# Allegro board XR871GT_REF_Simple_L2_V1_0-20170701.brd
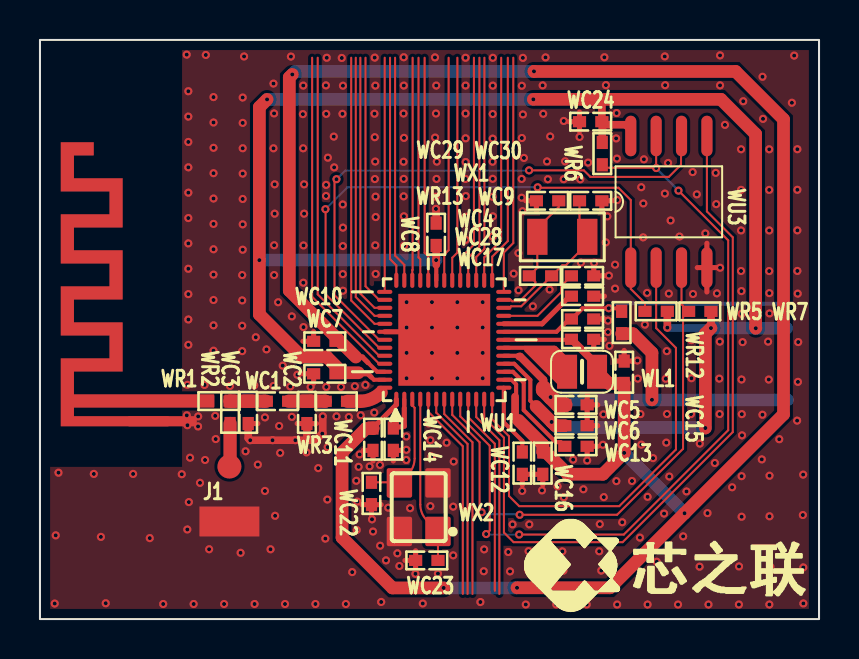
[diagram p0: board, top side]
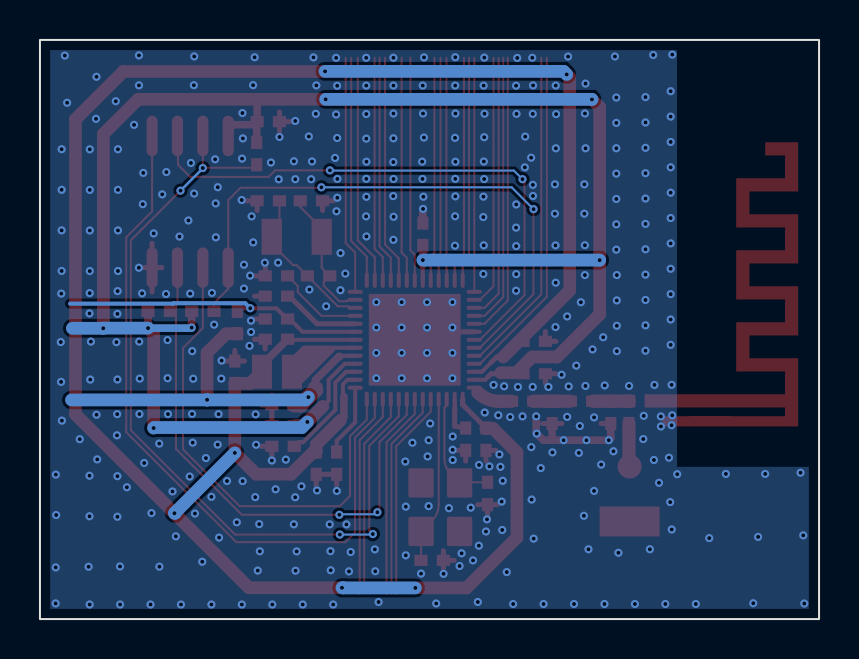
[diagram p1: board, bottom side, seen from below]

Outline 39 x 29 mm; copper layers: TOP, BOTTOM. Coordinates in mm from the lower left corner of the outline.
Outline path: rectangle 0,0 39,29

## Design rules (mm)
net group RF: nets ANT N16735516 N16735520

## Placement (name value [footprint] x y rotation side)
J1  ANT  [ANT2]  9.48 6.14 0 top
NOREF  -  []  0.51 7.62 90 top
NOREF#2  -  []  0 29 0 top
NOREF#3  -  []  0.51 7.62 90 top
NOREF#4  -  []  0 29 0 top
NOREF#5  -  []  1.04 9.65 90 top
NOREF#6  -  []  4.14 22.07 0 top
NOREF#7  -  []  0 0 90 top
WC1  0R  [C0402]  11.89 10.91 180 top
WC2  NC  [C0402]  13.36 10.35 90 top
WC3  NC  [C0402]  10.43 10.35 90 top
WC4  4.7uF  [C0402]  27.16 16.17 180 top
WC5  4.7uF  [C0402]  26.83 10.73 0 top
WC6  4.7uF  [C0402]  26.83 9.69 0 top
WC7  104  [C0402]  14.26 12.28 0 top
WC8  104  [C0402]  19.83 19.27 90 top
WC9  1uF  [C0402]  27.16 17.19 180 top
WC10  104  [C0402]  14.26 13.91 0 top
WC11  104  [C0402]  16.67 9.01 90 top
WC12  4.7uF  [C0402]  24.15 7.81 90 top
WC13  4.7uF  [C0402]  26.83 8.65 180 top
WC14  1uF  [C0402]  17.69 9.01 90 top
WC15  4.7uF  [C0402]  29.25 12.36 90 top
WC16  NC-104  [C0402]  25.17 7.81 90 top
WC17  NC-104  [C0402]  27.16 14.01 180 top
WC22  20pF  [C0402]  16.6 6.29 90 top
WC23  20pF  [C0402]  19.36 2.94 180 top
WC24  104  [C0402]  27.57 24.91 180 top
WC28  100pF  [C0402]  27.16 15.03 180 top
WC29  18pF  [C0402]  25.41 20.94 180 top
WC30  18pF  [C0402]  27.57 20.94 0 top
WL1  3.3uH-1.0A DCR<0.2R  [L0806]  27.14 12.39 0 top
WR1  0R  [R0402]  8.96 10.91 180 top
WR2  NC-0R  [R0402]  9.52 10.35 270 top
WR3  0R-NC  [R0402]  14.84 10.91 180 top
WR5  100K-NC  [R0402]  30.85 15.41 0 top
WR6  NC-100K  [R0402]  28.15 23.31 90 top
WR7  NC-100K  [R0402]  33.03 15.41 0 top
WR12  10K  [R0402]  29.12 14.85 270 top
WR13  NC-10M  [R0402]  25.05 17.19 180 top
WU1  XR871G  [QFN52P0_4B6X6_NOSOCKET]  20.24 13.98 0 top
WU3  PN25F16BSSIUG  [SOIC-8]  31.48 20.89 90 top
WX1  32768_FC-135  [XATL-FC-135]  26.15 19.14 180 top
WX2  24MHz-E3SB24E004304E  [CRY-TSX3225]  18.96 5.6 180 top

## Library data of the parts
J1 = ANT_0
WC1-WC9 WC12-WC15 WC23 WC24 = CAPACITOR
WC10 WC11 WC16 WC17 WC22 WC28-WC30 = CAPACITOR_0
WL1 = INDUCTOR
WR1-WR3 WR5-WR7 = R
WR12 WR13 = R1 0805
WU1 = XR871G
WU3 = SPI-NOR-SO8
WX1 = CRYSTAL_32.768K_FC-135
WX2 = Crystal4Pin_0

## Footprints (pads in the part's own frame, mm; a bottom-side part is the same pattern mirrored in y, then rotated)
ANT2
  round 1.2 smd: 1(0,1.5)
  rect 3x1.5 smd: 2(0,-1.25)
C0402
  rect 0.66x0.56 smd: 1(-0.56,0) 2(0.56,0)
CRY-TSX3225
  custom 1.27x1.47 smd: 1(-0.965,1.215) 2(-0.965,-1.215) 3(0.965,-1.215) 4(0.965,1.215)
L0806
  rect 1x1.7 smd: 1(0.75,0) 2(-0.75,0)
QFN52P0_4B6X6_NOSOCKET
  oval 0.203x0.762 smd: 1(-2.4,-2.981) 2(-2,-2.981) 3(-1.6,-2.981) 4(-1.2,-2.981) 5(-0.8,-2.981) 6(-0.4,-2.981) 7(0,-2.981) 8(0.4,-2.981) 9(0.8,-2.981) 10(1.2,-2.981) 11(1.6,-2.981) 12(2,-2.981) 13(2.4,-2.981) 27(2.4,2.981) 28(2,2.981) 29(1.6,2.981) 30(1.2,2.981) 31(0.8,2.981) 32(0.4,2.981) 33(0,2.981) 34(-0.4,2.981) 35(-0.8,2.981) 36(-1.2,2.981) 37(-1.6,2.981) 38(-2,2.981) 39(-2.4,2.981)
  oval 0.762x0.203 smd: 14(2.981,-2.4) 15(2.981,-2) 16(2.981,-1.6) 17(2.981,-1.2) 18(2.981,-0.8) 19(2.981,-0.4) 20(2.981,0) 21(2.981,0.4) 22(2.981,0.8) 23(2.981,1.2) 24(2.981,1.6) 25(2.981,2) 26(2.981,2.4) 40(-2.981,2.4) 41(-2.981,2) 42(-2.981,1.6) 43(-2.981,1.2) 44(-2.981,0.8) 45(-2.981,0.4) 46(-2.981,0) 47(-2.981,-0.4) 48(-2.981,-0.8) 49(-2.981,-1.2) 50(-2.981,-1.6) 51(-2.981,-2) 52(-2.981,-2.4)
  rect 4.597x4.597 smd: 53(0,0)
R0402
  rect 0.66x0.56 smd: 1(-0.56,0) 2(0.56,0)
SOIC-8
  oval 2.032x0.559 smd: 1(-3.296,1.905) 2(-3.296,0.635) 3(-3.296,-0.635) 4(-3.296,-1.905) 5(3.296,-1.905) 6(3.296,-0.635) 7(3.296,0.635) 8(3.296,1.905)
XATL-FC-135
  rect 1.016x1.803 smd: 1(-1.25,0) 2(1.25,0)

## Nets
GND: J1.2 WC2.1 WC3.1 WC4.1 WC5.2 WC6.2 WC7.1 WC8.2 WC9.1 WC10.1 WC11.1 WC12.1 WC13.1 WC14.1 WC15.2 WC16.1 WC17.1 WC22.1 WC23.2 WC24.2 WC28.1 WC29.2 WC30.2 WU1.45(TEST) WU1.53(EPAD) WU3.4(VSS) WX2.2 WX2.4(5)
VCC-BAT: WC5.1 WR12.2 WU1.18(VCC)
VDD25-EF: WC4.2 WU1.22(VDD25_EF)
VDD-3V3: WC6.1 WC7.2 WC8.1 WC24.1 WR5.2 WR6.2 WR7.2 WU1.17(VDD_3V3) WU1.34(VDD_IO) WU1.51(VDD33_PA) WU3.8(VCC)
ANT: WC1.1 WC2.2 WR3.2
CHIP-PWD: WC28.2 WR12.1 WU1.21(CHIP_PWD)
HXTAL1: WC23.1 WU1.4(HXTAL1) WX2.1
HXTAL2: WC22.2 WU1.3(HXTAL2) WX2.3
LXTAL1: WC29.1 WR13.2 WU1.25(LXTAL1) WX1.2
LXTAL2: WC30.1 WR13.1 WU1.24(LXTAL2) WX1.1
PA0: WU1.5(PA0/SPI1_MOSI/SD_CMD/UART0_TX/C)
PA1: WU1.6(PA1/SPI1_MISO/SD_DATA0/UART0_RX)
PA2: WU1.11(PA2/SPI1_CLK/SD_CLK/TWI1_SCL/CS)
PA3: WU1.10(PA3/SPI1_CS0/SD_DATA1/TWI1_SDA/)
PA4: WU1.35(PA4/WUPIO0/UART1_CTS/SD_DATA2/T)
PA5: WU1.36(PA5/WUPIO1/UART1_RTS/SD_DATA3/T)
PA6: WU1.37(PA6/WUPIO2/UART1_TX/SPI1_CS1/TW)
PA7: WU1.38(PA7/WUPIO3/UART1_RX/SPI1_CS2/TW)
PA8: WU1.26(PA8/ADC_CH0/PWM0/TWI1_SCL/CSI_P)
PA9: WU1.27(PA9/ADC_CH1/PWM1/TWI1_SDA/CSI_M)
PA10: WU1.28(PA10/ADC_CH2/PWM2/DMIC_CLK/CSI_)
PA11: WU1.29(PA11/ADC_CH3/PWM3/DMIC_DATA/CSI)
PA12: WU1.30(PA12/ADC_CH4/PWM4/I2S_MCLK/IR_T)
PA13: WU1.31(PA13/ADC_CH5/PWM5/I2S_BCLK/32KO)
PA14: WU1.32(PA14/ADC_CH6/PWM6/I2S_DI/IR_RX/)
PA15: WU1.33(PA15/ADC_CH7/PWM7/I2S_DO/UART1_)
PA16: WU1.7(PA16/IR_TX/IR_RX/I2S_LRCLK/UART)
PA17: WU1.39(PA17/WUPIO4/TWI0_SCL/IR_RX/TWI1)
PA18: WU1.40(PA18/WUPIO5/TWI0_SDA/IR_TX/TWI1)
PA19: WU1.41(PA19/WUPIO6/NUART_CTS/NSWD_TMS/)
PA20: WU1.42(PA20/WUPIO7/NUART_RTS/NSWD_TCK/)
PA21: WU1.43(PA21/WUPIO8/NUART_TX/DMIC_CLK/P)
PA22: WU1.44(PA22/WUPIO9/NUART_RX/DMIC_DATA/)
PCBANT: WR1.2
SPI0-CLK: WU1.46(PB7/SPI0_CLK/SD_CLK/FLASH_CLK/E) WU3.6(CLK)
SPI0-CS: WR5.1 WU1.47(PB6/SPI0_CS0/FLASH_CS/EINTB6) WU3.1(CS#)
SPI0-HOLD: WR6.1 WU1.9(PB3/SWD_TCK/JTAG_TDI/PWM7/FLASH) WU3.7(HOLD#)
SPI0-MISO: WU1.13(PB5/SPI0_MISO/SD_DATA0/FLASH_MI) WU3.2(MISO)
SPI0-MOSI: WU1.12(PB4/SPI0_MOSI/SD_CMD/FLASH_MOSI) WU3.5(MOSI)
SPI0-WP: WR7.1 WU1.8(PB2/SWD_TMS/JTAG_TDO/PWM6/FLASH) WU3.3(WP#)
UART0-RX: WU1.48(PB1/UART0_RX/JTAG_TCK/PWM5/SWD_)
UART0-TX: WU1.49(PB0/UART0_TX/JTAG_TMS/PWM4/SWD_)
N16732104: WC10.2 WC11.2 WC15.1 WC16.2 WC17.2 WL1.1 WU1.1(VDD14_RX) WU1.15(VDD14_DIG) WU1.20(VDD_SENSE) WU1.50(VDD14_TX)
N16732180: WR3.1 WU1.52(ANT)
N16732230: WL1.2 WU1.19(VDD_VLX)
N16732278: WC14.2 WU1.2(VDD12_CLK)
N16732320: WC13.2 WU1.16(VDD12_DIG)
N16732574: WC12.2 WU1.14(VDD12_SRAM)
N16732608: WC9.2 WU1.23(VDD_RTC)
N16735516: J1.1 WR2.2
N16735520: WC1.2 WC3.2 WR1.1 WR2.1

## Via types
v1: diameter 0.406, hole 0.203, TOP to BOTTOM, 430 vias

## Routing (per net, layer and track width the routed paths; a pad name or vN(x,y) marks a point on that pad's centre or on a via; arc(x,y) is an arc through that point)
GND: length 35.9
  TOP w0.254: 28.26,17.19 WC9.1 27.72,17.67 ; 27.39,10.24 WC5.2 ; WC5.2 27.39,11.21 ; WC5.2 27.93,10.73 ; 18.8,2.45 WC23.2 ; WC23.2 18.27,2.94 ; WC23.2 18.8,3.42 ; WC4.1 28.26,16.17 ; 24.15,6.71 WC12.1 24.63,7.25 ; 17.69,7.91 WC14.1 18.17,8.45 ; 24.85,20.46 WC29.2 24.32,20.94 ; 16.67,7.91 WC11.1 16.19,8.45 ; 26.48,24.91 WC24.2 ; WC24.2 27.01,24.42 ; WC24.2 27.01,25.39 ; 24.69,7.25 WC16.1 25.17,6.71 ; 27.39,10.17 WC6.2 27.93,9.69 ; WC3.1 10.91,9.79 ; 13.7,14.39 WC10.1 13.17,13.91 ; 27.72,13.53 WC17.1 28.26,14.01 ; WU1.45 19.84,14.38 WU1.53 ; 32.9,17.6 WU3.4 ; WU3.4 33.87,17.6 ; WU3.4 33.39,18.82 ; WU3.4 33.39,16.38 ; WC15.2 29.73,12.92 ; WC15.2 28.76,12.92 ; WC15.2 29.25,13.45 ; 16.11,5.73 WC22.1 ; WC22.1 17.08,5.73 ; WC22.1 16.6,5.2 ; WC28.1 28.26,15.03 ; 12.88,9.79 WC2.1 13.85,9.79 ; 27.93,8.65 WC13.1 27.39,8.17 ; 28.13,20.46 WC30.2 28.66,20.94 ; 13.7,11.8 WC7.1 13.17,12.28
  TOP w0.381: v1(14.16,10.15) 14.16,9.31 v1(14.13,9.29) 13.8,8.96 13.27,8.96 ; WC2.1 13.36,9.05 13.27,8.96 ; WC3.1 10.43,9.06 v1(10.53,8.96) v1(11.64,8.96) v1(12.79,8.96) 13.27,8.96 ; WC8.2 19.83,20.53 v1(19.82,20.54) 19.83,20.55
  vias: v1(0.74,0.78) v1(0.79,4.19) v1(0.93,7.33) v1(2.7,7.27) v1(3.05,4.11) v1(3.29,0.79) v1(4.66,7.27) v1(5.5,4.05) v1(6.17,0.75) v1(7.1,7.25) v1(7.35,28.27) v1(7.35,10.2) v1(7.43,26.43) v1(7.43,25.16) v1(7.43,23.89) v1(7.43,22.62) v1(7.43,21.35) v1(7.43,20.08) v1(7.43,18.81) v1(7.43,17.54) v1(7.43,16.27) v1(7.43,15) v1(7.43,13.73) v1(7.38,11.73) v1(7.38,9.71) v1(7.45,5.86) v1(7.38,4.49) v1(7.51,8.08) v1(7.69,0.75) v1(7.92,10.15) v1(7.92,9.64) v1(8.01,6.82) v1(8.24,11.72) v1(8.27,7.97) v1(8.3,28.25) v1(8.47,3.5) v1(8.69,26.14) v1(8.69,24.87) v1(8.69,23.6) v1(8.69,22.33) v1(8.69,21.06) v1(8.69,19.79) v1(8.69,18.52) v1(8.69,17.25) v1(8.69,15.98) v1(8.69,14.71) v1(8.69,13.44) v1(8.77,10.18) v1(8.8,9.01) v1(9.22,0.75) v1(9.51,11.67) v1(10.04,3.32) v1(10.15,26.12) v1(10.15,24.85) v1(10.15,23.58) v1(10.15,22.31) v1(10.15,21.04) v1(10.15,19.77) v1(10.15,18.5) v1(10.12,17.23) v1(10.12,15.96) v1(10.12,14.69) v1(10.12,13.42) v1(10.22,28.17) v1(10.29,8.4) v1(10.73,11.7) v1(10.74,0.75) v1(10.81,14.11) v1(10.91,7.74) v1(11.26,10.1) v1(11.26,6.42) v1(11.34,13.5) v1(11.54,3.5) v1(11.69,26.81) v1(11.72,25.32) v1(11.69,23.57) v1(11.75,21.77) v1(11.75,20.3) v1(11.72,18.72) v1(11.72,17.23) v1(11.69,11.67) v1(11.77,5.17) v1(11.92,15.86) v1(11.97,9.67) v1(12.02,8.32) v1(12.15,12.69) v1(12.27,0.75) v1(12.56,28.17) v1(12.53,11.65) v1(12.61,15.15) v1(12.61,10.12) v1(12.89,12.23) v1(13.16,25.29) v1(13.18,26.72) v1(13.17,23.57) v1(13.22,21.77) v1(13.22,20.3) v1(13.19,18.71) v1(13.18,16.84) v1(13.19,14.62) v1(13.35,8.35) v1(13.55,11.62) v1(13.79,0.75) v1(13.93,7.56) v1(14.36,28.11) v1(14.32,26.72) v1(14.33,25.3) v1(14.33,21.74) v1(14.32,21.19) v1(14.34,11.62) v1(14.28,4.03) v1(14.41,23.1) v1(14.4,8.61) v1(14.39,5.98) v1(14.71,24.16) v1(14.73,22.62) v1(14.84,10.15) v1(15.11,28.1) v1(15.17,26.71) v1(15.14,25.3) v1(15.16,20.76) v1(15.17,19.6) v1(15.16,18.68) v1(15.16,17.27) v1(15.17,16.44) v1(15.07,11.62) v1(15.31,0.75) v1(15.46,10.12) v1(15.63,2.35) v1(15.76,11.66) v1(15.83,6.92) v1(15.86,4.46) v1(15.95,7.62) v1(15.89,5.88) v1(16.06,10.21) v1(16,8.24) v1(16.29,11.72) v1(16.5,7.64) v1(16.62,4.99) v1(16.76,28.12) v1(16.75,25.31) v1(16.76,24.13) v1(16.76,22.03) v1(16.73,10.34) v1(16.67,4.38) v1(16.79,26.71) v1(16.78,22.91) v1(16.8,21.15) v1(16.81,20.13) v1(16.78,18.71) v1(16.8,17.28) v1(17.02,7.72) v1(17.03,3.67) v1(17.08,0.86) v1(17.32,2.94) v1(17.43,5.58) v1(17.89,3.29) v1(17.99,2.66) v1(18.21,28.13) v1(18.21,26.72) v1(18.2,25.32) v1(18.22,24.1) v1(18.2,22.9) v1(18.21,22.04) v1(18.21,21.17) v1(18.22,20.17) v1(18.22,18.69) v1(18.35,15.87) v1(18.35,14.6) v1(18.35,13.33) v1(18.35,12.06) v1(18.34,9.14) v1(18.34,8.47) v1(18.34,7.97) v1(18.53,5.55) v1(18.8,2.27) v1(19.16,0.78) v1(19.47,9.79) v1(19.54,8.96) v1(19.54,5.65) v1(19.62,15.87) v1(19.62,14.6) v1(19.62,13.33) v1(19.62,12.06) v1(19.59,8.14) v1(19.77,28.13) v1(19.84,26.72) v1(19.82,25.32) v1(19.78,24.11) v1(19.87,22.91) v1(19.85,22.04) v1(19.81,21.15) v1(19.92,2.28) v1(20.36,8.83) v1(20.71,7.89) v1(20.69,5.63) v1(20.69,3.19) v1(20.89,15.87) v1(20.89,14.6) v1(20.89,13.33) v1(20.89,12.06) v1(21.31,28.11) v1(21.31,26.72) v1(21.31,25.32) v1(21.31,24.07) v1(21.31,22.89) v1(21.3,22.04) v1(21.32,21.18) v1(21.3,20.14) v1(21.31,18.99) v1(22.05,0.85) v1(22.16,15.87) v1(22.16,14.6) v1(22.16,13.33) v1(22.16,12.06) v1(22.24,3.49) v1(22.21,2.4) v1(22.67,28.11) v1(22.67,26.71) v1(22.66,25.29) v1(22.66,24.06) v1(22.66,22.9) v1(22.66,22.04) v1(22.66,21.15) v1(22.66,19.16) v1(22.67,20.17) v1(23.44,3.36) v1(23.53,2.39) v1(23.66,4.74) v1(23.71,17.3) v1(23.95,18.33) v1(23.96,16.47) v1(24.12,26.71) v1(24.12,24.09) v1(24.11,22.04) v1(24.11,21.1) v1(24.16,20.42) v1(24.14,6.42) v1(24.17,28.1) v1(24.18,25.27) v1(24.23,23.09) v1(24.32,0.73) v1(24.46,3.4) v1(24.44,2.44) v1(24.5,4.74) v1(24.67,15.66) v1(25.16,26.72) v1(25.13,6.44) v1(25.19,25.3) v1(25.31,28.13) v1(25.38,22.92) v1(25.43,22.02) v1(25.54,24.17) v1(25.51,16.5) v1(25.84,0.73) v1(25.91,6.65) v1(26.15,3.39) v1(26.22,24.94) v1(26.22,22.03) v1(26.22,6.1) v1(26.21,2.42) v1(26.29,22.92) v1(26.29,4.74) v1(26.69,7.98) v1(27.01,24.14) v1(27.05,22.02) v1(27.08,17.85) v1(27.2,6.5) v1(27.37,0.73) v1(27.44,22.86) v1(27.39,7.94) v1(27.74,17.85) v1(28.02,4.75) v1(27.99,3.39) v1(28.1,2.43) v1(28.25,28.13) v1(28.2,10.25) v1(28.18,8.73) v1(28.22,6.11) v1(28.33,26.74) v1(28.33,18.86) v1(28.4,20.17) v1(28.44,14.94) v1(28.43,14.37) v1(28.48,17.2) v1(28.51,13.68) v1(28.86,25.34) v1(28.84,24.07) v1(28.79,17.74) v1(28.79,16.55) v1(28.85,6.91) v1(28.88,23.06) v1(28.9,20.98) v1(28.89,0.73) v1(29.15,4.85) v1(29.64,6.91) v1(29.91,12.94) v1(29.92,12.04) v1(30.06,10.26) v1(30.03,4.08) v1(30.1,21.63) v1(30.1,8.74) v1(30.23,23.02) v1(30.2,20.81) v1(30.2,19.11) v1(30.28,14.74) v1(30.39,16.33) v1(30.42,6.12) v1(30.42,0.73) v1(30.69,8.06) v1(30.88,2.87) v1(31.24,5.28) v1(31.28,28.17) v1(31.3,26.73) v1(31.28,21.31) v1(31.33,12.03) v1(31.35,8.83) v1(31.44,22.84) v1(31.38,13.42) v1(31.39,10.27) v1(31.57,19.96) v1(31.48,16.3) v1(31.5,7.14) v1(31.94,0.73) v1(32.01,19.15) v1(32.2,4.14) v1(32.36,6.39) v1(32.61,13.97) v1(32.61,12.06) v1(32.59,10.26) v1(32.67,22.38) v1(32.69,16.28) v1(32.88,21.27) v1(33.03,8.79) v1(33.02,2.62) v1(33.31,19.31) v1(33.42,5.31) v1(33.46,0.73) v1(33.83,22.34) v1(33.85,20.78) v1(33.78,7.82) v1(33.89,16.31) v1(34.04,28.23) v1(34.04,26.73) v1(34.05,17.59) v1(34.03,13.89) v1(34.01,12.04) v1(34.02,10.27) v1(34.29,24.75) v1(34.65,6.6) v1(34.99,2.63) v1(34.99,0.73) v1(35.1,23.53) v1(35.1,21.49) v1(35.1,19.46) v1(35.1,17.43) v1(35.11,16.42) v1(35.12,15.28) v1(35.12,12) v1(35.13,10.26) v1(35.14,9.2) v1(35.12,7.16) v1(35.12,5.12) v1(35.2,25.93) v1(35.17,13.87) v1(36.17,27.16) v1(36.17,10.23) v1(36.13,8) v1(36.2,25.05) v1(36.45,13.89) v1(36.5,23.52) v1(36.5,21.49) v1(36.5,19.46) v1(36.5,17.43) v1(36.51,16.32) v1(36.52,15.31) v1(36.48,11.99) v1(36.52,7.18) v1(36.52,5.15) v1(36.57,2.62) v1(36.51,0.73) v1(37.01,9.01) v1(37.64,25.85) v1(37.75,28.22) v1(37.91,23.53) v1(37.91,21.5) v1(37.91,19.46) v1(37.91,17.43) v1(37.93,16.3) v1(37.96,13.87) v1(37.94,11.88) v1(37.9,9.94) v1(38.2,7.23) v1(38.19,5.21) v1(38.21,2.59) v1(38.21,0.78)
VCC-BAT: length 20.6
  TOP w0.203: 23.95,13.18 WU1.18
  TOP w0.254: 23.99,13.15 23.95,13.18
  TOP w0.381: 25.21,11.57 25.21,11.98 24.04,13.15 23.99,13.15
  TOP w0.635: v1(30.63,10.98) 30.63,13.33 29.68,14.29 WR12.2
  TOP w0.762: 25.21,11.57 25.21,11.47 v1(25.56,11.12) 25.95,10.73 WC5.1
  BOTTOM w0.635: v1(25.56,11.12) 25.7,10.97 30.63,10.97 v1(30.63,10.98) 30.64,10.97 37.42,10.97
VDD25-EF: length 4
  TOP w0.102: WC4.2 26.52,16.17
  TOP w0.254: 26.52,16.17 25.14,14.78 WU1.22
VDD-3V3: length 94
  TOP w0.127: 15.15,12.33 15.1,12.28 WC7.2
  TOP w0.203: WU1.51 16.71,11.98 16.58,12.12 ; WU1.17 23.74,12.78 24.55,11.98 24.55,10.94 24.84,10.65 ; WU1.34 19.84,17.74
  TOP w0.254: 15.94,12.33 15.99,12.28 16.42,12.28 16.58,12.12
  TOP w0.381: WC8.1 v1(19.83,17.98) 19.84,17.97 19.84,17.74 ; WU3.8 29.58,24.5 29.32,24.75 28.28,24.75 28.15,24.89 ; WR7.2 33.59,14.57 v1(33.59,14.57) ; 28.15,24.89 WR6.2 ; 28.15,24.89 WC24.1 28.13,26 28.1,26.02 ; WR5.2 v1(31.41,14.59)
  TOP w0.635: v1(24.7,26.02) 34.09,26.02 35.82,24.29 35.82,14.62 35.83,14.61 v1(35.83,14.56) ; v1(33.31,9.57) 33.31,14.29 v1(33.59,14.57) ; 24.84,10.65 v1(25.61,9.87) 25.8,9.69 WC6.1 ; 15.94,12.33 15.15,12.33 14.36,13.12 13.12,13.12 10.98,15.25 v1(10.98,17.97) 10.98,25.63 v1(11.37,26.02)
  BOTTOM w0.381: v1(33.59,14.57) 31.43,14.57 v1(31.41,14.59)
  BOTTOM w0.635: v1(19.83,17.98) 10.99,17.98 v1(10.98,17.97) ; v1(25.61,9.87) 25.89,9.59 33.28,9.59 v1(33.31,9.57) ; v1(24.7,26.02) 11.37,26.02 v1(11.37,26.02) ; v1(33.59,14.57) 35.82,14.57 v1(35.83,14.56) 37.38,14.56
ANT: length 2
  TOP w0.102: WC2.2 13.57,10.91
  TOP w0.66: WC1.1 14.27,10.91 WR3.2
CHIP-PWD: length 15.6
  TOP w0.203: WR12.1 28.97,15.56 28.48,15.56 v1(28.47,15.57) 28.47,15.56 27.16,15.56 26.63,15.03 WC28.2 26.5,15.03 25.85,14.38 WU1.21
  BOTTOM w0.203: v1(28.47,15.57) 28.72,15.81 32.32,15.81 32.34,15.79 37.49,15.79
HXTAL1: length 8.4
  TOP w0.102: WC23.1 WX2.1 19.36,4.95 arc(19.12,5.31) 19.04,5.73 WU1.4
HXTAL2: length 5.9
  TOP w0.102: WC22.2 17.96,6.85 WX2.3 18.43,7.25 arc(18.67,7.62) 18.76,8.04 18.76,10.58 18.64,10.7 WU1.3
LXTAL1: length 6.9
  TOP w0.102: WC29.1 25.97,20.64 24.9,19.57 WX1.2 24.9,17.59 WR13.2 24.8,16.88 24.8,16.7 24.01,15.92 23.63,15.92 23.56,15.98 WU1.25
LXTAL2: length 7.8
  TOP w0.102: WC30.1 27.01,19.53 WX1.1 27.4,18.79 26.32,17.72 26.15,17.72 WR13.1 24.09,15.66 23.58,15.66 23.5,15.58 WU1.24
PA0: length 10.5
  TOP w0.102: WU1.5 19.44,10.38 21.17,8.65 21.17,1.26
PA1: length 10.4
  TOP w0.102: WU1.6 19.84,10.34 21.41,8.77 21.41,1.26
PA2: length 10.2
  TOP w0.102: 23,1.26 23,8.96 21.84,10.11 WU1.11
PA3: length 10.1
  TOP w0.102: 22.77,1.41 22.77,8.78 21.44,10.11 WU1.10
PA4: length 11.2
  TOP w0.102: 19.26,28.11 19.26,18.34 19.44,18.16 WU1.35
PA5: length 11.2
  TOP w0.102: 18.95,28.11 18.95,18.11 19.04,18.02 WU1.36
PA6: length 11.1
  TOP w0.102: WU1.37 18.64,17.47 18.65,17.49 18.65,28.11
PA7: length 11.3
  TOP w0.102: WU1.38 18.24,17.74 17.78,18.2 17.78,28.11
PA8: length 11.9
  TOP w0.102: 23.69,28.11 23.69,18.83 23.22,18.35 WU1.26
PA9: length 11.5
  TOP w0.102: 23.42,28.11 23.42,18.93 22.64,18.15 WU1.27
PA10: length 11.5
  TOP w0.102: WU1.28 22.24,18.11 23.09,18.96 23.09,28.11
PA11: length 11.3
  TOP w0.102: 22.25,28.11 22.25,18.54 21.84,18.13 WU1.29
PA12: length 11.4
  TOP w0.102: WU1.30 21.44,18.1 22,18.66 22,28.11
PA13: length 11.4
  TOP w0.102: 21.72,28.11 21.72,18.75 21.04,18.07 WU1.31
PA14: length 11.2
  TOP w0.102: WU1.32 20.64,18.09 20.9,18.35 20.9,28.11
PA15: length 11.2
  TOP w0.102: WU1.33 20.24,18.25 20.46,18.47 20.46,28.11
PA16: length 10.3
  TOP w0.102: WU1.7 20.24,10.27 21.65,8.85 21.65,1.26
PA17: length 11.3
  TOP w0.102: WU1.39 17.84,17.71 17.52,18.03 17.52,28.11
PA18: length 11.7
  TOP w0.102: WU1.40 17.26,28.11
PA19: length 12.7
  TOP w0.102: 16.3,28.11 16.3,16.67 16.98,15.98 WU1.41
PA20: length 13.3
  TOP w0.102: 16.04,28.11 16.04,16.3 16.75,15.58 WU1.42
PA21: length 13.8
  TOP w0.102: WU1.43 16.75,15.18 15.81,16.13 15.81,28.11
PA22: length 14.3
  TOP w0.102: WU1.44 16.75,14.78 15.58,15.95 15.58,28.11
SPI0-CLK: length 28.6
  TOP w0.102: WU1.46 16.98,13.98 14.74,16.22 14.74,21.93 v1(14.84,22.03) ; 32.09,24.16 32.09,22.75 31.48,22.14 27.55,22.14 27.23,22.47 v1(24.48,22.47)
  TOP w0.127: 32.09,24.16 WU3.6
  BOTTOM w0.102: v1(14.84,22.03) 15.27,22.46 24.47,22.46 v1(24.48,22.47)
SPI0-CS: length 30.2
  TOP w0.102: v1(14.29,20.53) 14.3,20.52 14.3,16.27 16.98,13.58 WU1.47 ; v1(24.91,21.62) 24.94,21.6 28.96,21.6 29.58,20.98 WU3.1 29.58,16.53 30.29,15.82 WR5.1
  BOTTOM w0.102: v1(14.29,20.53) 15.38,21.62 v1(24.91,21.62)
SPI0-HOLD: length 40.7
  TOP w0.102: 30.85,22.59 30.83,22.6 28.3,22.6 WR6.1 ; 30.85,22.59 WU3.7 ; 30.85,22.59 v1(30.85,22.59) ; WU1.9 21.04,10.15 22.51,8.68 22.51,4.43 v1(22.34,4.26) ; v1(23.99,4.23) 29.23,4.23 34.45,9.46 34.45,18.96 v1(31.96,21.45)
  BOTTOM w0.102: v1(23.99,4.23) 22.36,4.23 v1(22.34,4.26)
  BOTTOM w0.127: v1(30.85,22.59) 30.85,22.57 v1(31.96,21.45)
SPI0-MISO: length 24.4
  TOP w0.102: WU3.2 30.85,14.57 31.84,13.58 31.84,8.49 29,5.65 23.99,5.65 23.48,6.16 23.48,9.15 22.64,9.99 WU1.13
SPI0-MOSI: length 36.4
  TOP w0.102: WU1.12 22.24,10.07 23.23,9.08 23.23,4.33 23.71,3.85 29.17,3.85 34.68,9.36 34.68,19.12 33.39,20.41 WU3.5
SPI0-WP: length 27.1
  TOP w0.102: WU3.3 32.12,15.76 WR7.1 32.19,15.13 32.19,8.52 28.89,5.22 v1(24.01,5.22) ; v1(22.11,5.35) 22.01,5.45 22.01,8.85 20.64,10.22 WU1.8
  BOTTOM w0.102: v1(24.01,5.22) 23.99,5.25 22.21,5.25 v1(22.11,5.35)
UART0-RX: length 16.5
  TOP w0.102: 13.9,28.11 13.9,16.26 16.98,13.18 WU1.48
UART0-TX: length 17
  TOP w0.102: 13.62,28.11 13.62,16.14 16.98,12.78 WU1.49
N16732104: length 117.9
  TOP w0.102: WC10.2 14.85,13.91
  TOP w0.127: 14.86,14.07 14.72,13.93 14.85,13.91
  TOP w0.203: WU1.15 23.61,11.98 23.84,11.76 23.84,11.19 23.78,11.14 ; 16.42,12.84 16.88,12.38 WU1.50 ; WU1.20 26.58,13.98 WC17.2
  TOP w0.254: 15.81,13.12 16.14,13.12 16.42,12.84 ; 16.67,9.54 16.64,9.51 16.51,9.42 ; WC11.2 17.84,10.73 WU1.1
  TOP w0.381: 23.78,11.14 23.78,10.12 23.96,9.95 ; WC17.2 27.89,12.73 WL1.1
  TOP w0.635: 15.81,13.12 12.48,16.45 12.48,27.12 v1(12.63,27.27) ; 23.96,9.95 25.17,8.74 WC16.2 25.31,8.37 26.43,7.25 28.18,7.25 v1(29.25,8.32) WC15.1 28.47,11.8 WL1.1 ; v1(24.73,27.43) 24.73,27.42 34.82,27.42 37.22,25.02 37.22,10.25 v1(32.27,5.3) 28.54,1.57 v1(23.88,1.57) ; v1(20.21,1.56) 17.64,1.56 15.12,4.08 15.12,8.35 16.32,9.54 16.67,9.54 WC11.2
  BOTTOM w0.635: v1(24.73,27.43) 12.79,27.43 v1(12.63,27.27) ; v1(23.88,1.57) 23.82,1.57 23.82,1.56 v1(20.21,1.56) ; v1(32.27,5.3) 32.24,5.3 32.22,5.32 32.22,5.35 v1(29.25,8.32)
N16732180: length 2.1
  TOP w0.102: 17.08,11.34 17.21,11.48 arc(17.25,11.53) WU1.52
  TOP w0.66: WR3.1 16.02,10.91 arc(16.59,11.02) 17.08,11.34
N16732230: length 2.6
  TOP w0.203: 25.77,13.55 25.73,13.58 WU1.19
N16732278: length 1.9
  TOP w0.203: 18.24,10.57 WU1.2
  TOP w0.254: 18.24,10.57 18.24,9.66 WC14.2
N16732320: length 5.4
  TOP w0.203: WU1.16 23.67,12.38 24.22,11.84 24.22,10.47 25.82,8.86 26.07,8.86 WC13.2
N16732574: length 3.6
  TOP w0.203: WU1.14 23.22,9.85 24.15,8.92 WC12.2
N16732608: length 4.4
  TOP w0.102: WC9.2 26.09,16.68 26.09,16.37 24.91,15.18 WU1.23
N16735516: length 2.2
  TOP w0.508: J1.1 9.52,7.64 9.52,7.67
  TOP w0.66: J1.1 9.52,7.67 WR2.2
N16735520: length 2.7
  TOP w0.102: 11.23,10.91 11.33,10.91 ; 11.23,10.91 WC3.2 ; 11.23,10.91 11.23,10.91
  TOP w0.66: WC1.2 9.52,10.91 WR2.1

## Copper pours and planes (outline as drawn; the poured copper is in the pictures)
GND on TOP (solid shape): 7.85,9.65 4.43,9.65 4.43,10.16 7.85,10.16
GND on TOP, BOTTOM: 0.51,0.51 0.51,28.49 38.49,28.49 38.49,0.51
PCBANT on TOP (solid shape): 2.69,23.22 1.7,23.22 1.7,22.07 4.14,22.07 4.14,19.61 1.7,19.61 1.7,18.47 4.14,18.47 4.14,16 1.7,16 1.7,14.86 4.14,14.86 4.14,12.4 1.7,12.4 1.7,11.25 8.72,11.25 8.72,10.59 1.7,10.59 1.7,10.16 6.44,10.16 6.44,9.65 1.04,9.65 1.04,13.06 3.48,13.06 3.48,14.2 1.04,14.2 1.04,16.66 3.48,16.66 3.48,17.81 1.04,17.81 1.04,20.27 3.48,20.27 3.48,21.41 1.04,21.41 1.04,23.88 2.69,23.88
N16732230 on TOP (solid shape): 26.81,12.72 26.81,11.67 26.76,11.62 26.05,11.62 24.24,13.43 24.24,13.68 25.84,13.68
